# EAGLE board MIDI-CPU-Rev-N (EAGLE 6.6.0)
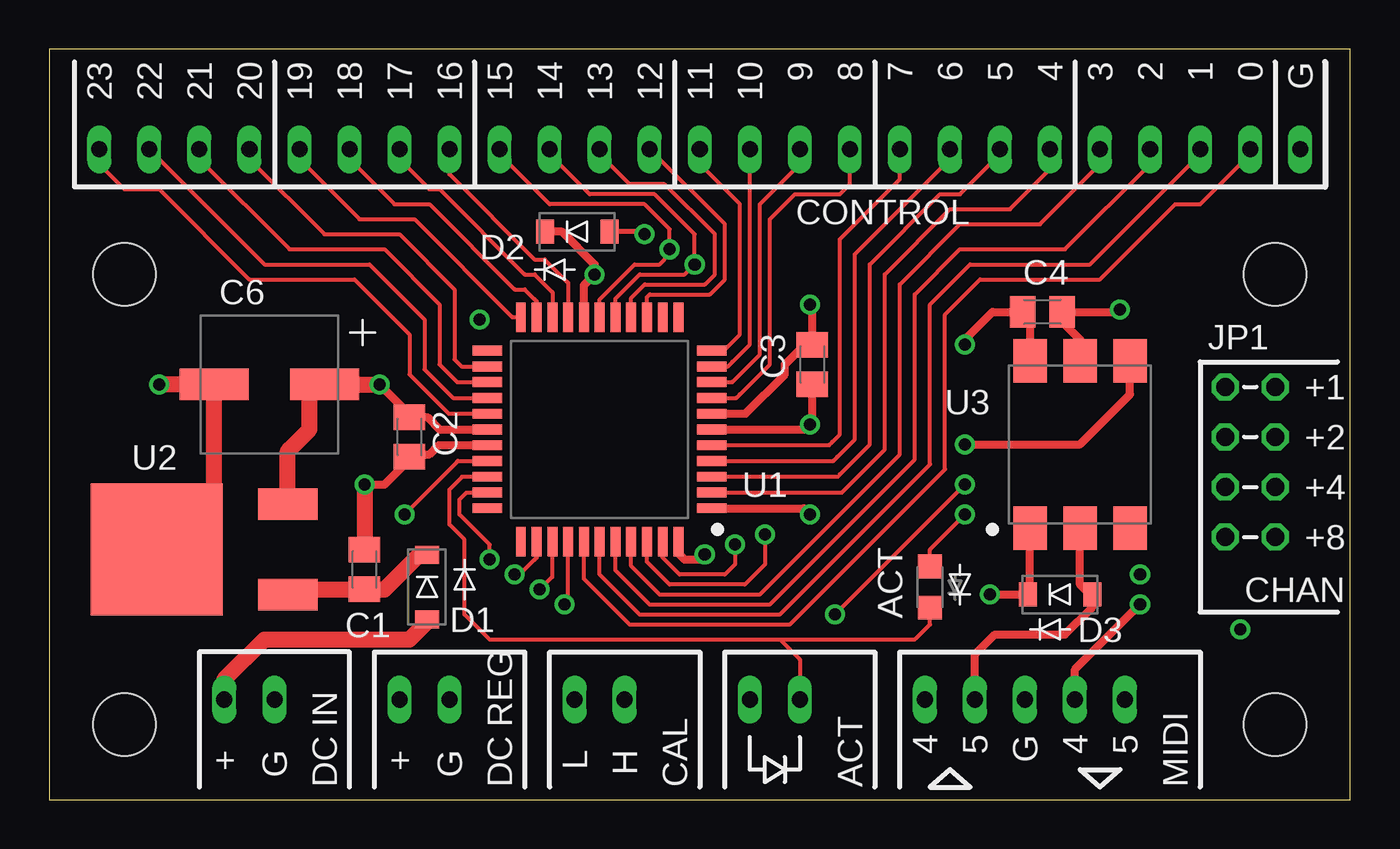
[diagram p0: board, top side]
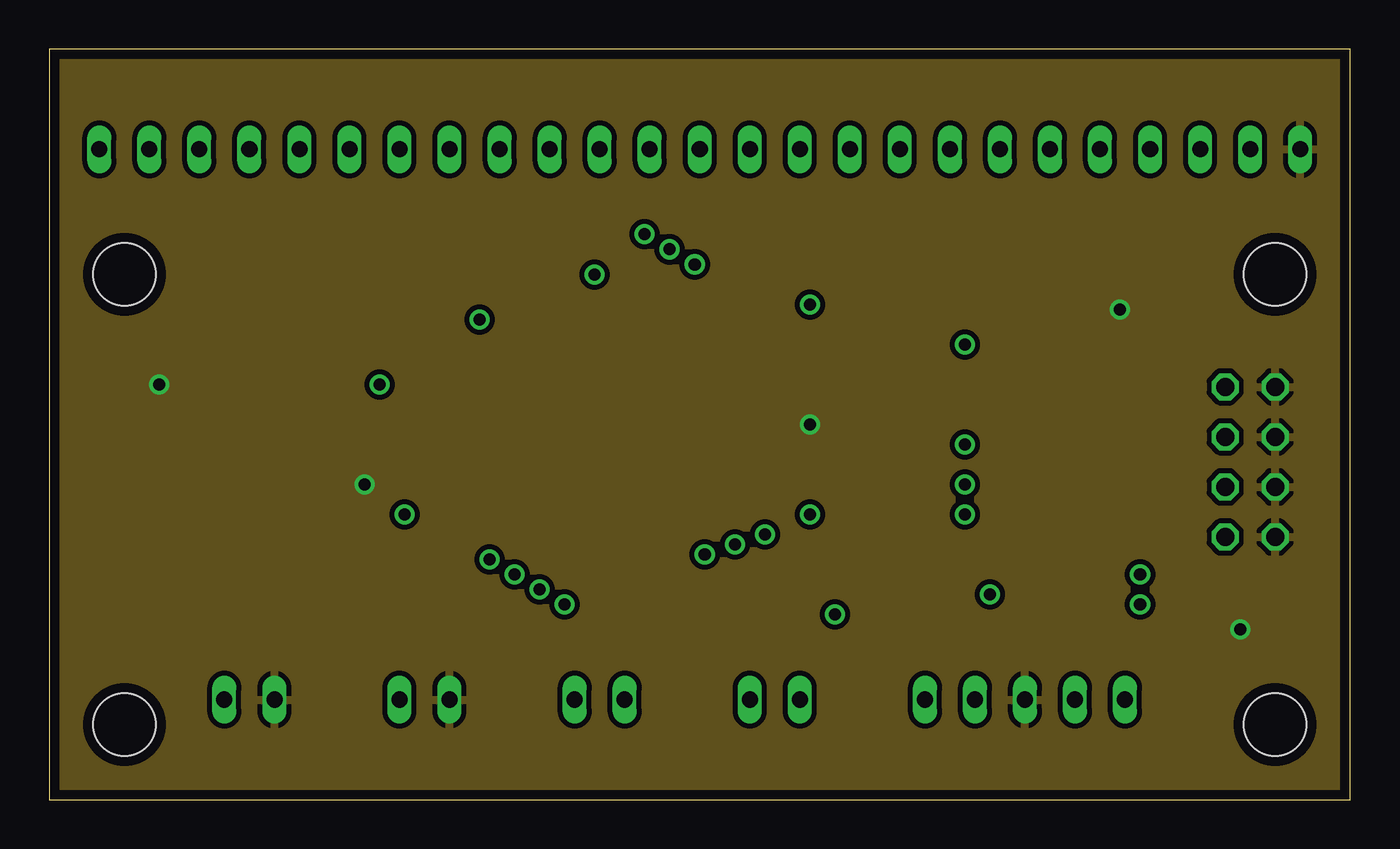
[diagram p1: board, inner layer GND$]
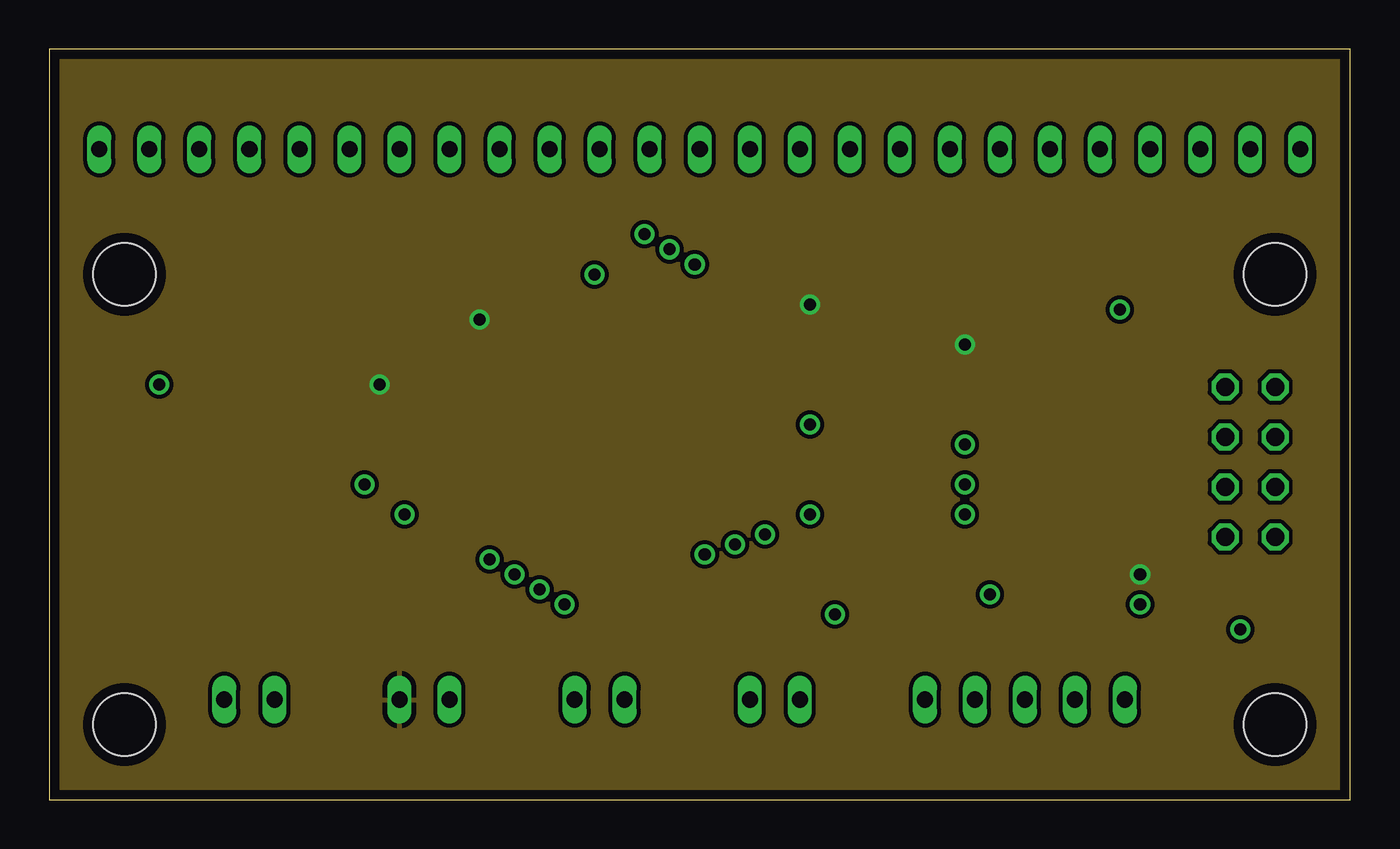
[diagram p2: board, inner layer VDD$]
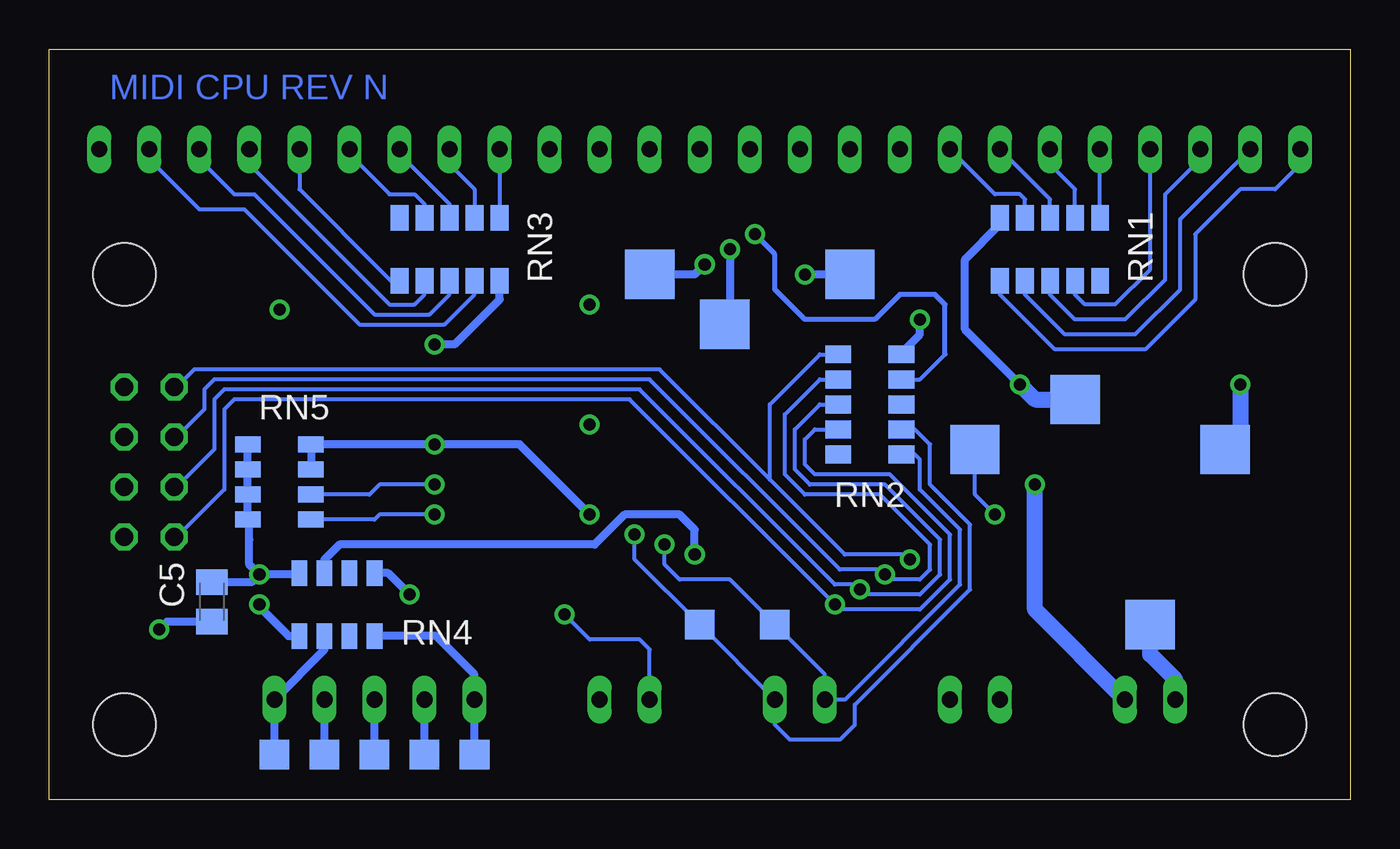
[diagram p3: board, bottom side, seen from below]

Size 66.04 x 38.1 mm. Coordinates in mm from the lower left corner, seen from the top.
Outline: 0,0 66.04,0 66.04,38.1 0,38.1 0,0
Copper layers (1+2*15+16): L1 0.0178mm / dielectric 12mil / GND$ 0.0356mm / dielectric 28mil / VDD$ 0.0356mm / dielectric 12mil / L4 0.0178mm
Design rules "SSC-EAGLE-4Lyr_v1.0.0.3": minimum track width 6mil, minimum drill 8mil, track to track 6mil, track to pad 6mil, pad to pad 6mil, via to via 6mil, smd to smd 6mil, copper to edge 20mil, drill to drill 16mil, minimum pad ring 8mil, minimum via ring 8mil, stop-mask expansion 3mil, vias tented up to drill 0mil, thermal gap 10mil
Net classes: 0 default: width 0.203 mm, drill 0.305 mm, clearance 0.203 mm; 1 power: width 0.406 mm, drill 0.305 mm, clearance 0.254 mm
Holes 3.17 mm at 3.81,3.81 62.23,3.81 3.81,26.67 62.23,26.67

## Footprints (pad centres in the part's own frame; a part is rotated, then mirrored left to right if it is on the bottom)
C0805K = smd 1.3 x 1.6: 1 -1,0; 2 1,0
NICHICON-6.3 = smd 1.6 x 3.5: P$2 0,2.8; P$3 0,-2.8
SOD123 = smd 1.219 x 0.914: P$1 0,1.638; P$2 0,-1.638
WIREPAD-NICE = drill 0.813 long: P$1 0,0
DOCKPAD-1.5MM = smd 1.5 x 1.5: P$1 0,0
DOCKPAD-2.5MM = smd 2.5 x 2.5: P$1 0,0
CHAN-JUMP = drill 0.914 octagon: P$1 -1.27,-1.27; P$2 1.27,-1.27; P$3 -1.27,1.27; P$4 1.27,1.27; P$5 3.81,1.27; P$6 3.81,-1.27; P$7 -3.81,-1.27; P$8 -3.81,1.27
LUMEX-0805 = smd 1.2 x 1.2: P$1 0,1.05; P$2 0,-1.05
CTS-745 = smd 1.3 x 0.9: P$2 -1.6,0; P$3 1.6,0; P$4 -1.6,-1.27; P$5 -1.6,-2.54; P$6 -1.6,1.27; P$7 -1.6,2.54; P$8 1.6,1.27; P$9 1.6,2.54; P$10 1.6,-1.27; P$11 1.6,-2.54
CTS-744 = smd 1.3 x 0.8: P$4 -1.6,-0.635; P$5 -1.6,-1.905; P$6 -1.6,0.635; P$7 -1.6,1.905; P$8 1.6,0.635; P$9 1.6,1.905; P$10 1.6,-0.635; P$11 1.6,-1.905
TQFP44 = smd 1.5 x 0.5: P$1 5.7,0; P$2 -5.7,0; P$5 5.7,-0.8; P$6 5.7,-1.6; P$7 5.7,-2.4; P$8 5.7,-3.2; P$9 5.7,-4; P$10 5.7,0.8; P$11 5.7,1.6; P$12 5.7,2.4; P$13 5.7,3.2; P$14 5.7,4; P$25 -5.7,-0.8; P$26 -5.7,-1.6; P$27 -5.7,-2.4; P$28 -5.7,-3.2; P$29 -5.7,-4; P$30 -5.7,0.8; P$31 -5.7,1.6; P$32 -5.7,2.4; P$33 -5.7,3.2; P$34 -5.7,4 | smd 0.5 x 1.5: P$3 0,-5.7; P$4 0,5.7; P$15 0.8,5.7; P$16 1.6,5.7; P$17 2.4,5.7; P$18 3.2,5.7; P$19 4,5.7; P$20 -0.8,5.7; P$21 -1.6,5.7; P$22 -2.4,5.7; P$23 -3.2,5.7; P$24 -4,5.7; P$35 -0.8,-5.7; P$36 -1.6,-5.7; P$37 -2.4,-5.7; P$38 -3.2,-5.7; P$39 -4,-5.7; P$40 0.8,-5.7; P$41 1.6,-5.7; P$42 2.4,-5.7; P$43 3.2,-5.7; P$44 4,-5.7
DPAK = smd 6.7 x 6.7: P$1 2.4,0 | smd 3 x 1.6: P$3 -4.25,2.3; P$4 -4.25,-2.3
SMT-6 = smd 2.2 x 1.7: P$4 4.25,2.54; P$5 4.25,0; P$6 4.25,-2.54; P$7 -4.25,-2.54; P$8 -4.25,0; P$9 -4.25,2.54

## Placement (x,y rotation side)
C1  [C0805K]  16,11.68 90 top
C2  [C0805K]  18.29,18.41 90 top
C3  [C0805K]  38.73,22.1 90 top
C4  [C0805K]  50.42,24.77 0 top
C5  [C0805K]  57.78,10.03 270 bottom
C6  [NICHICON-6.3]  11.18,21.08 270 top
D1  X4  [SOD123]  19.18,10.79 0 top
D2  X4  [SOD123]  26.8,28.83 90 top
D3  T4  [SOD123]  51.31,10.41 90 top
E$5  [WIREPAD-NICE]  2.54,33.02 0 top
E$6  [WIREPAD-NICE]  5.08,33.02 0 top
E$7  [WIREPAD-NICE]  7.62,33.02 0 top
E$8  [WIREPAD-NICE]  10.16,33.02 0 top
E$9  [WIREPAD-NICE]  12.7,33.02 0 top
E$10  [WIREPAD-NICE]  15.24,33.02 0 top
E$11  [WIREPAD-NICE]  17.78,33.02 0 top
E$12  [WIREPAD-NICE]  20.32,33.02 0 top
E$13  [WIREPAD-NICE]  22.86,33.02 0 top
E$14  [WIREPAD-NICE]  25.4,33.02 0 top
E$15  [WIREPAD-NICE]  27.94,33.02 0 top
E$16  [WIREPAD-NICE]  30.48,33.02 0 top
E$17  [WIREPAD-NICE]  33.02,33.02 0 top
E$18  [WIREPAD-NICE]  35.56,33.02 0 top
E$19  [WIREPAD-NICE]  38.1,33.02 0 top
E$20  [WIREPAD-NICE]  40.64,33.02 0 top
E$21  [WIREPAD-NICE]  43.18,33.02 0 top
E$22  [WIREPAD-NICE]  45.72,33.02 0 top
E$23  [WIREPAD-NICE]  48.26,33.02 0 top
E$24  [WIREPAD-NICE]  50.8,33.02 0 top
E$25  [WIREPAD-NICE]  53.34,33.02 0 top
E$26  [WIREPAD-NICE]  55.88,33.02 0 top
E$27  [WIREPAD-NICE]  58.42,33.02 0 top
E$28  [WIREPAD-NICE]  60.96,33.02 0 top
E$29  [WIREPAD-NICE]  63.5,33.02 0 top
E$30  [WIREPAD-NICE]  11.43,5.08 0 top
E$34  [WIREPAD-NICE]  8.89,5.08 0 top
E$35  [DOCKPAD-1.5MM]  29.21,8.89 0 bottom
E$36  [DOCKPAD-1.5MM]  33.02,8.89 0 bottom
E$37  [WIREPAD-NICE]  17.78,5.08 0 top
E$38  [WIREPAD-NICE]  20.32,5.08 0 top
E$39  [DOCKPAD-2.5MM]  6.35,17.78 0 bottom
E$40  [WIREPAD-NICE]  35.56,5.08 0 top
E$41  [WIREPAD-NICE]  38.1,5.08 0 top
E$42  [WIREPAD-NICE]  44.45,5.08 0 top
E$43  [WIREPAD-NICE]  26.67,5.08 0 top
E$44  [WIREPAD-NICE]  29.21,5.08 0 top
E$45  [DOCKPAD-2.5MM]  13.97,20.32 0 bottom
E$47  [WIREPAD-NICE]  46.99,5.08 0 top
E$48  [DOCKPAD-2.5MM]  19.05,17.78 0 bottom
E$49  [WIREPAD-NICE]  49.53,5.08 0 top
E$50  [WIREPAD-NICE]  52.07,5.08 0 top
E$51  [WIREPAD-NICE]  54.61,5.08 0 top
E$52  [DOCKPAD-1.5MM]  44.45,2.29 0 bottom
E$53  [DOCKPAD-1.5MM]  46.99,2.29 0 bottom
E$54  [DOCKPAD-1.5MM]  49.53,2.29 0 bottom
E$55  [DOCKPAD-2.5MM]  10.16,8.89 0 bottom
E$56  [DOCKPAD-2.5MM]  25.4,26.67 0 bottom
E$57  [DOCKPAD-2.5MM]  31.75,24.13 0 bottom
E$58  [DOCKPAD-2.5MM]  35.56,26.67 0 bottom
E$59  [DOCKPAD-1.5MM]  52.07,2.29 0 bottom
E$60  [DOCKPAD-1.5MM]  54.61,2.29 0 bottom
JP1  [CHAN-JUMP]  60.96,17.14 90 top
LED1  [LUMEX-0805]  44.7,10.79 180 top
RN1  103  [CTS-745]  15.24,27.94 270 bottom
RN2  103  [CTS-745]  24.38,20.07 180 bottom
RN3  103  [CTS-745]  45.72,27.94 270 bottom
RN4  221  [CTS-744]  51.44,9.91 270 bottom
RN5  102  [CTS-744]  54.36,16.13 180 bottom
U1  PIC16F887  [TQFP44]  27.94,18.8 180 top
U2  [DPAK]  7.86,12.7 180 top
U3  PC900V  [SMT-6]  52.32,18.03 90 top

## Library data of the parts
C1-C5 = rcl
C6 D1-D3 E$5-E$30 E$34-E$45 E$47-E$60 JP1 LED1 RN1-RN5 U1-U3 = 0jrs

## Nets
ACT: E$41.P$1 LED1.P$1 U1.P$12
CAL-H: E$36.P$1 E$44.P$1 RN2.P$6 U1.P$22
CAL-L: E$35.P$1 E$43.P$1 RN2.P$7 U1.P$23
CHAN0: JP1.P$5 RN2.P$11 U1.P$13
CHAN1: JP1.P$4 RN2.P$10 U1.P$18
CHAN2: JP1.P$3 RN2.P$3 U1.P$17
CHAN3: JP1.P$8 RN2.P$8 U1.P$16
DEBUG: E$48.P$1 U1.P$11
GND [power]: C1.2 C2.1 C3.1 C4.2 C5.2 C6.P$3 E$29.P$1 E$30.P$1 E$38.P$1 E$39.P$1 E$49.P$1 E$54.P$1 JP1.P$1 JP1.P$2 JP1.P$6 JP1.P$7 U1.P$2 U1.P$10 U2.P$1 U3.P$5
PCLK: E$14.P$1 E$58.P$1 U1.P$35
PDAT: E$13.P$1 E$57.P$1 U1.P$3
RN3: E$23.P$1 RN3.P$2 U1.P$32
RX: RN5.P$4 RN5.P$5 U1.P$34 U3.P$6
S$1: E$8.P$1 RN1.P$8 U1.P$8
S$2: E$7.P$1 RN1.P$3 U1.P$7
S$3: E$6.P$1 RN1.P$10 U1.P$6
S$4: E$5.P$1 RN1.P$11 U1.P$5
S$5: C1.1 D1.P$1 U2.P$3
S$6: E$51.P$1 E$60.P$1 RN4.P$10
S$7: RN2.P$2
S$8: E$50.P$1 E$59.P$1 RN4.P$11
S$9: E$9.P$1 RN1.P$7 U1.P$44
S$10: E$10.P$1 RN1.P$6 U1.P$43
S$11: E$11.P$1 RN1.P$2 U1.P$42
S$12: E$12.P$1 RN1.P$4 U1.P$41
S$13: E$42.P$1 E$52.P$1 RN4.P$9
S$14: E$40.P$1 RN5.P$6
S$15: E$15.P$1 U1.P$36
S$16: E$16.P$1 U1.P$37
S$17: E$17.P$1 U1.P$29
S$18: E$18.P$1 U1.P$28
S$19: E$19.P$1 U1.P$27
S$20: E$20.P$1 U1.P$26
S$21: E$28.P$1 RN3.P$8 U1.P$15
S$22: E$27.P$1 RN3.P$3 U1.P$4
S$23: E$26.P$1 RN3.P$10 U1.P$20
S$24: E$25.P$1 RN3.P$11 U1.P$21
S$25: E$24.P$1 RN3.P$4 U1.P$33
S$27: E$22.P$1 RN3.P$6 U1.P$31
S$28: E$21.P$1 RN3.P$7 U1.P$30
S$29: D1.P$2 E$34.P$1 E$55.P$1
S$30: D3.P$1 RN4.P$7 U3.P$9
S$31: D3.P$2 E$47.P$1 E$53.P$1 U3.P$8
S$33: D2.P$2 RN2.P$4
S$34: LED1.P$2 RN5.P$7
TX: RN4.P$4 U1.P$24
VDD: C2.2 C3.2 C4.1 C5.1 C6.P$2 E$37.P$1 E$45.P$1 RN1.P$5 RN2.P$5 RN3.P$9 RN4.P$5 RN5.P$8 RN5.P$9 RN5.P$10 RN5.P$11 U1.P$1 U1.P$25 U2.P$4 U3.P$4
VPP: D2.P$1 E$56.P$1 U1.P$40

## Tracks (layer width: path | path; a pad name or v marks a point on that pad's centre or on a via)
ACT
  L1 0.203: LED1.P$1 44.7,8.89 43.94,8.13 37.08,8.13 | 37.08,8.13 22.35,8.13 21.08,9.4 21.08,13.21 20.32,13.97 20.32,15.75 20.95,16.38 20.97,16.4 U1.P$12 | E$41.P$1 38.1,7.11 37.08,8.13
CAL-H  (via drill 0.61)
  L1 0.203: v36.32,13.46 36.32,11.94 35.31,10.92 31.5,10.92 30.48,11.94 30.34,12.08 U1.P$22
  L4 0.203: v36.32,13.46 36.32,12.19 E$36.P$1 E$44.P$1 | E$44.P$1 29.46,5.08 | E$44.P$1 29.21,3.81 28.45,3.05 25.91,3.05 25.15,3.81 25.15,4.83 19.3,10.67 19.3,13.97 21.34,16 21.34,18.03 22.1,18.8 RN2.P$6
CAL-L  (via drill 0.61)
  L1 0.203: v34.8,12.95 34.8,11.94 34.29,11.43 32,11.43 31.24,12.19 31.14,12.29 U1.P$23
  L4 0.203: v34.8,12.95 34.8,11.94 34.04,11.18 31.5,11.18 E$35.P$1 26.67,6.35 E$43.P$1 25.65,5.08 19.81,10.92 19.81,13.72 21.84,15.75 21.84,17.27 22.1,17.53 RN2.P$7
CHAN0  (via drill 0.61)
  L1 0.203: v22.35,12.19 22.35,12.95 20.83,14.48 20.83,15.24 21.08,15.49 21.18,15.6 U1.P$13
  L4 0.203: JP1.P$5 59.69,20.83 58.67,21.84 35.05,21.84 29.46,16.26 | 29.46,16.26 25.65,12.45 22.61,12.45 v22.35,12.19 | 29.46,16.26 29.46,20.07 26.92,22.61 RN2.P$11
CHAN1  (via drill 0.61)
  L1 0.203: v23.62,11.43 23.88,11.43 24.64,12.19 24.74,12.29 U1.P$18
  L4 0.203: JP1.P$4 59.69,18.29 58.17,19.81 58.17,20.83 57.66,21.34 35.56,21.34 25.91,11.68 23.88,11.68 v23.62,11.43 23.37,11.18 21.84,11.18 21.34,11.68 21.34,12.95 23.88,15.49 27.69,15.49 28.7,16.51 28.7,19.56 26.92,21.34 RN2.P$10
CHAN2  (via drill 0.61)
  L1 0.203: v24.89,10.67 25.53,11.3 25.54,11.32 U1.P$17
  L4 0.203: JP1.P$3 59.69,15.75 57.66,17.78 57.66,20.32 57.15,20.83 36.07,20.83 26.16,10.92 25.15,10.92 v24.89,10.67 24.64,10.41 21.84,10.41 20.83,11.43 20.83,13.21 23.62,16 27.43,16 28.19,16.76 28.19,18.8 26.92,20.07 RN2.P$3
CHAN3  (via drill 0.61)
  L1 0.203: v26.16,9.91 26.29,10.03 26.34,10.08 U1.P$16
  L4 0.203: JP1.P$8 59.69,13.21 57.15,15.75 57.15,19.81 56.64,20.32 36.58,20.32 v26.16,9.91 25.91,9.65 21.84,9.65 20.32,11.18 20.32,13.46 23.37,16.51 27.18,16.51 27.69,17.02 27.69,18.29 27.18,18.8 RN2.P$8
DEBUG  (via drill 0.61)
  L1 0.203: v18.03,14.48 20.7,17.14 20.75,17.2 U1.P$11
  L4 0.203: E$48.P$1 19.05,15.49 v18.03,14.48
GND  (via drill 0.61)
  L1 0.406: v16,16 17.02,16 18.29,17.27 C2.1 18.29,17.53 19.3,17.53 19.77,18 U1.P$10 | v54.36,24.89 54.23,24.77 C4.2 51.42,24.5 51.31,24.38 52.32,23.37 U3.P$5 | 38.62,21.1 C3.1 38.73,19.18 v38.61,19.05 38.35,18.8 U1.P$2
  L1 0.813: v16,16 C1.2 | C6.P$3 7.11,21.08 | C6.P$3 | C6.P$3 v5.59,21.08 | U2.P$1 6.48,12.7 8.38,14.61 8.38,20.95 8.38,20.96 C6.P$3
  L4 0.406: 5.59,18.54 E$39.P$1 | E$54.P$1 E$49.P$1 | C5.2 60.05,9.03 v60.45,8.64
  L4 0.813: E$30.P$1 16,9.65 v16,16 | v5.59,21.08 5.59,18.54
  pour GND$: 0,0 66.04,0 66.04,38.1 0,38.1
PCLK  (via drill 0.61)
  L1 0.203: E$14.P$1 25.4,32.77 27.43,30.73 30.73,30.73 32.77,28.7 v32.77,27.18 32.26,26.67 29.97,26.67 28.83,25.53 28.74,25.44 U1.P$35
  L4 0.406: v32.77,27.18 33.27,26.67 E$58.P$1
PDAT  (via drill 0.61)
  L1 0.203: E$13.P$1 22.86,32.77 25.4,30.23 30.23,30.23 31.5,28.96 v31.5,27.94 31.5,27.69 30.99,27.18 29.72,27.18 28.07,25.53 27.94,25.4 U1.P$3
  L4 0.406: E$57.P$1 31.5,24.38 v31.5,27.94
RN3
  L1 0.203: E$23.P$1 48.26,32.77 46.23,30.73 45.21,30.73 41.66,27.18 41.66,18.03 40.13,16.51 40.02,16.4 U1.P$32
  L4 0.203: E$23.P$1 48.26,32.77 45.72,30.23 RN3.P$2
RX  (via drill 0.61)
  L1 0.406: 38.48,14.61 38.35,14.73 | v46.48,18.03 52.32,18.03 54.86,20.57 U3.P$6 | 38.48,14.61 v38.61,14.48 | U1.P$34 38.29,14.8 38.48,14.61
  L4 0.406: v38.61,14.48 42.16,18.03 v46.48,18.03 RN5.P$5 52.76,17.96 52.7,17.91 52.76,17.86 RN5.P$4
S$1
  L1 0.203: E$8.P$1 10.16,32.51 13.97,28.7 17.78,28.7 20.57,25.91 20.57,22.35 20.93,22 U1.P$8
  L4 0.203: E$8.P$1 10.16,26.92 11.94,25.15 13.46,25.15 13.97,25.65 RN1.P$8 13.97,26.57
S$2
  L1 0.203: E$7.P$1 7.62,32.51 12.19,27.94 17.02,27.94 19.81,25.15 19.81,22.1 20.71,21.2 U1.P$7
  L4 0.203: E$7.P$1 7.62,32.51 9.4,30.73 9.4,26.42 11.43,24.38 13.97,24.38 15.24,25.65 RN1.P$3 15.24,26.67
S$3
  L1 0.203: E$6.P$1 10.92,27.18 16.26,27.18 19.05,24.38 19.05,21.84 20.5,20.4 U1.P$6
  L4 0.203: E$6.P$1 8.64,29.46 8.64,25.91 10.92,23.62 14.48,23.62 16.51,25.65 RN1.P$10 16.51,26.67
S$4
  L1 0.203: 2.54,32.77 E$5.P$1 2.54,32.26 3.81,30.99 5.59,30.99 10.16,26.42 15.49,26.42 18.29,23.62 18.29,21.59 20.28,19.6 U1.P$5
  L4 0.203: E$5.P$1 2.54,32.26 3.81,30.99 5.59,30.99 7.87,28.7 7.87,25.4 10.41,22.86 14.99,22.86 17.78,25.65 RN1.P$11 17.78,26.57
S$5
  L1 0.813: D1.P$1 19.18,12.45 19.16,12.43 18.78,12.43 17.02,10.67 16,10.67 C1.1 12.21,10.68 12.19,10.67 12.11,10.59 U2.P$3
S$6
  L4 0.406: E$60.P$1 E$51.P$1 52.07,7.62 RN4.P$10
S$8  (via drill 0.61)
  L1 0.406: E$50.P$1 52.07,6.6 v55.37,9.91
  L4 0.406: E$59.P$1 E$50.P$1 | 55.12,9.91 v55.37,9.91 55.37,9.78 53.9,8.31 RN4.P$11
S$9
  L1 0.203: E$9.P$1 12.7,32.51 15.75,29.46 18.54,29.46 23.5,24.51 23.51,24.5 U1.P$44
  L4 0.203: RN1.P$7 E$9.P$1
S$10
  L1 0.203: E$10.P$1 15.24,32.51 17.53,30.23 19.3,30.23 23.62,25.91 24.13,25.91 24.64,25.4 24.74,25.3 U1.P$43
  L4 0.203: E$10.P$1 15.24,32.26 13.97,30.99 RN1.P$6
S$11
  L1 0.203: E$11.P$1 17.78,32.51 19.3,30.99 19.81,30.99 24.13,26.67 24.64,26.67 25.53,25.78 25.54,25.77 U1.P$42
  L4 0.203: E$11.P$1 15.24,30.48 RN1.P$2
S$12
  L1 0.203: E$12.P$1 20.32,31.75 24.64,27.43 25.15,27.43 26.29,26.29 26.34,26.24 U1.P$41
  L4 0.203: E$12.P$1 18.03,30.73 16.76,30.73 16.51,30.48 RN1.P$4
S$13
  L4 0.406: E$52.P$1 E$42.P$1 44.45,6.35 46.41,8.31 RN4.P$9
S$14  (via drill 0.61)
  L1 0.203: v39.88,9.4 v46.48,16
  L4 0.203: v39.88,9.4 38.61,8.13 36.07,8.13 35.56,7.62 E$40.P$1 | v46.48,16 49.28,16 49.78,15.49 RN5.P$6
S$15
  L1 0.203: E$15.P$1 27.94,32.77 29.46,31.24 31.24,31.24 33.78,28.7 33.78,26.67 33.27,26.16 30.23,26.16 29.59,25.53 29.54,25.48 U1.P$36
S$16
  L1 0.203: E$16.P$1 34.29,29.21 34.29,26.42 33.53,25.65 30.48,25.65 30.35,25.53 30.34,25.51 U1.P$37
S$17
  L1 0.203: E$17.P$1 33.02,32.26 35.05,30.23 35.05,23.62 34.42,22.99 34.23,22.8 U1.P$29
S$18
  L1 0.203: E$18.P$1 35.56,23.11 34.67,22.23 34.44,22 U1.P$28
S$19
  L1 0.203: E$19.P$1 38.1,32.26 36.07,30.23 36.07,22.61 34.67,21.21 34.66,21.2 U1.P$27
S$20
  L1 0.203: E$20.P$1 40.64,31.24 40.13,30.73 37.85,30.73 36.58,29.46 36.58,22.1 35.05,20.57 34.87,20.4 U1.P$26
S$21
  L1 0.203: E$28.P$1 60.96,32.77 58.42,30.23 57.15,30.23 53.34,26.42 47.24,26.42 45.47,24.64 45.47,16.76 37.59,8.89 29.46,8.89 27.18,11.18 27.14,11.21 U1.P$15
  L4 0.203: E$28.P$1 60.96,32.51 58.42,29.97 56.13,29.97 50.29,24.13 45.97,24.13 44.45,25.65 RN3.P$8
S$22
  L1 0.203: E$27.P$1 58.42,32.77 52.83,27.18 46.74,27.18 44.7,25.15 44.7,17.02 37.08,9.4 29.97,9.4 28.07,11.3 27.94,11.43 U1.P$4
  L4 0.203: E$27.P$1 58.42,32.51 56.64,30.73 55.63,30.73 49.53,24.64 46.74,24.64 45.72,25.65 RN3.P$3
S$23
  L1 0.203: 55.88,33.27 E$26.P$1 55.88,32.26 51.56,27.94 46.23,27.94 43.94,25.65 43.94,17.27 36.58,9.91 30.48,9.91 28.96,11.43 28.74,11.65 U1.P$20
  L4 0.203: E$26.P$1 55.88,32.26 48.77,25.15 47.5,25.15 46.99,25.65 RN3.P$10
S$24
  L1 0.203: E$25.P$1 53.34,32.26 50.29,29.21 46.23,29.21 43.18,26.16 43.18,17.53 36.07,10.41 30.99,10.41 29.59,11.81 29.54,11.86 U1.P$21
  L4 0.203: 49.02,26.67 48.92,26.57 | 49.02,26.67 53.34,30.99 E$25.P$1 | 48.26,26.16 RN3.P$11 48.69,26.34 49.02,26.67
S$25
  L1 0.203: E$24.P$1 50.8,32 48.77,29.97 45.72,29.97 42.42,26.67 42.42,17.78 40.39,15.75 40.23,15.6 U1.P$33
  L4 0.203: E$24.P$1 50.8,32.77 48.77,30.73 47.5,30.73 46.99,30.23 RN3.P$4
S$27
  L1 0.203: E$22.P$1 45.72,32.51 40.89,27.69 40.89,18.29 40.01,17.4 39.8,17.2 U1.P$31
  L4 0.203: E$22.P$1 45.72,32.26 44.45,30.99 RN3.P$6
S$28
  L1 0.203: E$21.P$1 43.18,31.5 40.13,28.45 40.13,18.54 39.75,18.16 39.59,18 U1.P$30
  L4 0.203: E$21.P$1 RN3.P$7
S$29
  L1 0.813: E$34.P$1 8.89,6.1 10.92,8.13 18.29,8.13 19.18,9.02 | 19.3,9.14 19.29,9.16 19.29,9.13 19.18,9.02 | 19.18,9.02 D1.P$2
  L4 0.813: E$55.P$1 10.16,7.37 8.89,6.1 E$34.P$1
S$30  (via drill 0.61)
  L1 0.406: U3.P$9 49.78,10.54 49.67,10.43 D3.P$1 v47.75,10.41
  L4 0.406: v47.75,10.41 48.84,11.51 RN4.P$7 49.53,11.18
S$31
  L1 0.406: E$47.P$1 47.24,5.08 46.99,5.33 46.99,7.37 48.01,8.38 51.56,8.38 52.95,9.77 D3.P$2 52.83,10.41 52.32,10.92 U3.P$8
  L4 0.406: E$53.P$1 E$47.P$1
S$33  (via drill 0.61)
  L1 0.254: D2.P$2 30.1,28.83 v30.23,28.7
  L4 0.203: RN2.P$4 21.84,21.34 20.57,22.61
  L4 0.254: v30.23,28.7 29.21,27.69 29.21,25.91 27.69,24.38 24.13,24.38 22.86,25.65 21.08,25.65 20.57,25.15 20.57,22.61
S$34  (via drill 0.61)
  L1 0.203: LED1.P$2 44.7,12.7 v46.48,14.48
  L4 0.203: v46.48,14.48 49.28,14.48 49.53,14.22 RN5.P$7
TX  (via drill 0.61)
  L1 0.406: v33.27,12.45 33.02,12.19 32.26,12.19 32,12.45 31.94,12.51 U1.P$24
  L4 0.406: v33.27,12.45 33.27,13.72 34.04,14.48 36.83,14.48 38.35,12.95 51.31,12.95 52.07,12.19 RN4.P$4
VDD  (via drill 0.61)
  L1 0.203: C6.P$2 13.46,21.08 13.21,20.83 | 18.29,19.3 C2.2 18.29,19.56
  L1 0.406: C2.2 19.19,19.41 19.81,18.8 U1.P$1 | v16.76,21.08 18.29,19.56 | 49.78,24.38 49.42,24.75 C4.1 49.4,24.77 | v46.48,23.11 46.48,23.37 47.88,24.77 49.4,24.77 | 38.61,23.11 38.35,22.86 38.1,22.86 37.34,22.1 37.34,21.59 35.34,19.6 U1.P$25 | v38.61,25.15 38.73,25.02 C3.2 38.72,23.11 38.61,23.11 | 38.61,23.11 38.35,23.11 | 49.78,24.38 U3.P$4 | 49.4,24.77 49.78,24.38
  L1 0.813: 13.21,20.83 13.21,18.8 12.19,17.78 12.11,17.7 U2.P$4 | C6.P$2 v16.76,21.08
  L4 0.203: 55.88,14.48 55.89,14.48 55.89,14.35 56.01,14.22 RN5.P$9 | 55.89,13.21 55.88,13.21 | 55.89,15.75 55.88,15.75 | 55.89,15.75 55.88,15.75 | 55.89,15.75 55.89,15.62 56.01,15.49
  L4 0.406: v16.76,21.08 19.56,23.88 19.56,27.43 17.78,29.21 RN1.P$5 | v46.48,23.11 45.47,23.11 43.18,25.4 RN3.P$9 | C5.1 55.77,11.03 v55.37,11.43 | v21.84,24.38 21.84,23.62 22.78,22.68 RN2.P$5 | RN4.P$5 53.34,11.43 v55.37,11.43 | v55.37,11.43 55.88,11.94 55.88,13.21 55.89,13.21 55.89,14.22 55.88,14.22 | RN5.P$11 55.96,16.84 55.88,16.76 RN5.P$10 55.96,15.57 | RN5.P$8 55.88,15.49 | 55.88,14.22 RN5.P$9 | RN5.P$8 55.96,14.3 55.88,14.22 | RN5.P$8 55.96,15.57 | RN5.P$8 56.01,15.49 55.96,15.54 55.96,15.57
  L4 0.813: E$45.P$1 16,20.32 v16.76,21.08
  pour VDD$: 0,0 66.04,0 66.04,38.1 0,38.1
VPP  (via drill 0.61)
  L1 0.406: D2.P$1 26.04,28.83 27.69,27.18 v27.69,26.67 27.14,26.12 U1.P$40
  L4 0.406: E$56.P$1 v27.69,26.67

## Text on the board
L4: MIDI CPU REV N
tPlace: 23 | 22 | 21 | 20 | 19 | 18 | 17 | 16 | 15 | 14 | 13 | 12 | 11 | 10 | 9 | 8 | 7 | 6 | 5 | 4 | 3 | 2 | 1 | 0 | G | CONTROL | +1 | +2 | +4 | +8 | ACT | CHAN | IN | REG | + | G | + | G | L | H | 4 | 5 | G | 4 | 5 | DC | DC | CAL | ACT | MIDI
Document: MIDI CPU / / copyright John Staskevich, 2017 / / john@codeandcopper.com / / / This work is licensed under a Creative Commons Attribution 4.0 International License. / http://creativecommons.org/licenses/by/4.0/